# Altium PCB main_old.PcbDoc (part 3 of 15)
Units mil, origin at the board's own origin, x right, y up, seen from the top; angles counter-clockwise.
Board outline 8394.55 x 5164.44 mil, 7 copper layers (Top Layer 1, Layer 2, Layer 3, Unused, Layer 4_pow, Layer 5_gnd, Bottom 6+gnd), stack 46.112 mil thick; 363 components, 409 nets, 1750 pads, 991 vias.
Unrouted connection lines stored in the file: 1.
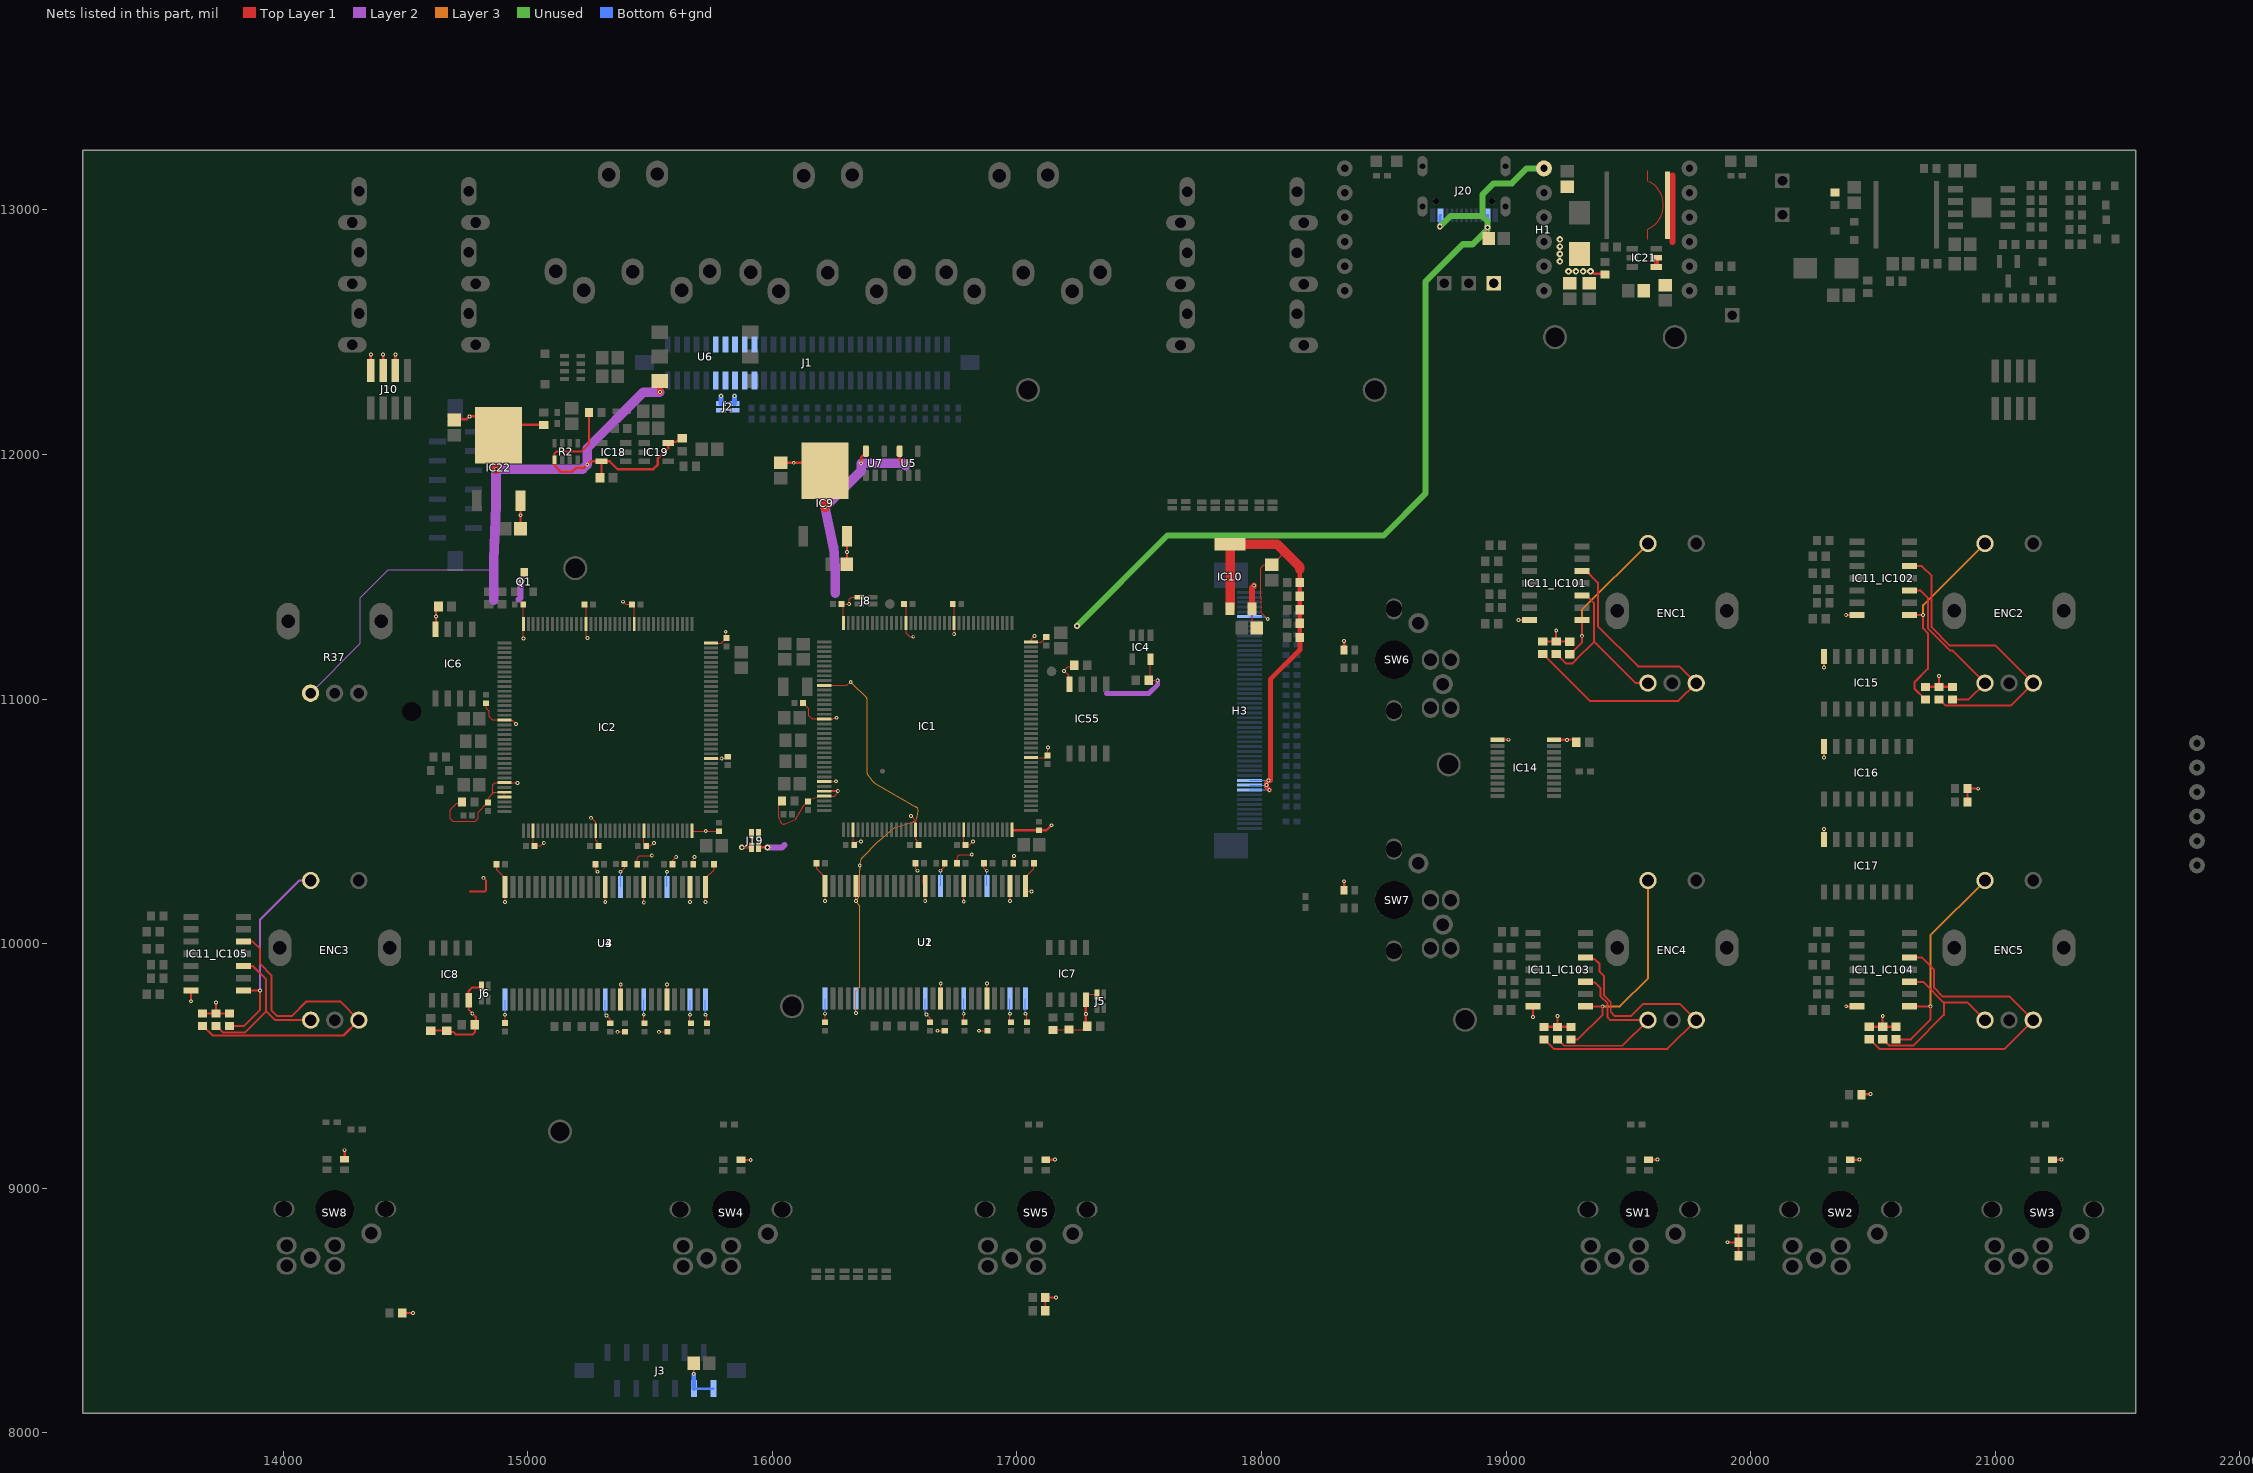
[diagram p6: the nets of this part, all layers, seen from the top]

## Via types
v1: diameter 15.75, hole 7.87, Top Layer 1 to Bottom 6+gnd, tented both sides, 923 vias
v2: diameter 27.56, hole 11.81, Top Layer 1 to Bottom 6+gnd, 45 vias
v3: diameter 23.62/23.62/23.62/23.62/23.62/23.62/23.62 (per signal layer), hole 12, Top Layer 1 to Bottom 6+gnd, tented top, 10 vias
v4: diameter 15.75, hole 7.87, Top Layer 1 to Bottom 6+gnd, 10 vias
v5: diameter 23.62/23.62/23.62/23.62/23.62/23.62/23.62 (per signal layer), hole 12, Top Layer 1 to Bottom 6+gnd, tented bottom, 3 vias

## Nets (pads, with @x,y where several pads share a name; then routed paths per layer and width w, separated by ;. In a path a pad name is that pad's centre, name@x,y a point inside that pad or via, vN(x,y) a via of type N, cw(c..) or ccw(c..) an arc to the next point about the centre after c; other vN are vias at no path point) (continued)
+MCU: (continued)
  Top Layer 1 w5: R6.1@14731.17,10579.63 14725.13,10573.59 14709.87,10573.59 14683.69,10547.41 14683.69,10510.42 14693.27,10500.84 14785.66,10500.84 14796.76,10511.94 14796.76,10537.57 14836.42,10577.23 C22.1@14837.21,10577.23 14837.21,10595.07 14856.76,10614.63 ; C23.1@14828.33,10982.94 14829.45,10981.82 14829.45,10962.67 14841.39,10950.74 14841.39,10928.26 14855.02,10914.63 IC2.17@14903.53,10914.63 ; C60.1@14872.11,10324.63 14872.05,10302.23 14907.25,10267.03 U3.27@14907.25,10232.09 14907.25,10232.03 v1@14907.25,10170.19 ; IC2.33@14904,10599.2 IC2.32@14904,10618.88 14861.01,10618.88 14856.76,10614.63 ; IC2.17@14904,10914.16 14936.68,10914.16 14951.33,10899.5 v1(14951.33,10898.26) ; C47.1@14905.91,9674.63 14906.7,9674.63 14907.12,9675.05 v1(14907.12,9709.43) ; v1(14958.33,10656.26) 14957.34,10657.25 14905,10657.25 IC2.30@14904,10658.25 14865.38,10658.25 14856.76,10649.63 14856.76,10614.63 ; v1(14974.74,11483.41) 14985,11493.68 Q1.3@14985,11518.19 ; C24.1@14981.25,11386.87 14982.27,11385.85 IC2.144@14982.27,11307.38 14981.71,11306.83 v1(14981.68,11247.06) ; IC2.39@15021.64,10461.87 15021.64,10404.75 C29.1@15026.76,10399.63 15052.7,10399.63 v1(15065.33,10412.26) ; C25.1@15231.25,11386.87 15238.18,11379.94 IC2.131@15238.18,11307.38 15238.18,11256.42 v1(15244.33,11250.26) ; v1(15258.85,10514.63) 15277.55,10495.93 IC2.52@15277.55,10461.87 15277.55,10422.52 15283.27,10416.8 15283.27,10405.44 C30.1@15289.08,10399.63 ; C59.1@15277.05,10324.63 15277.05,10302.02 v1(15284.96,10294.12) ; U3.14@15309.45,10275.1 15309.45,10239.53 U3.14@15316.95,10232.03 ; v1@15316.7,10170.19 U3.14@15316.7,10232.03 ; v1(15321.45,9706.63) 15336.7,9691.39 C48.1@15336.7,9674.63 ; v1(15366.7,9639.63) 15367.05,9639.98 C49.1@15396.7,9639.98 ; U3.43@15372.56,9764.27 15379.69,9771.4 U3.43@15379.69,9771.46 v1@15379.69,9833.24 ; v1(15379.45,10294.12) 15396.7,10311.37 C58.1@15396.7,10324.63 ; v1(15389.33,11398.26) 15400.72,11386.87 C26.1@15426.25,11386.87 15435.03,11378.09 IC2.121@15435.03,11307.38 ; C57.1@15447.11,10324.63 15447.05,10349.98 15456.59,10359.52 15506.06,10359.52 v1(15506.85,10360.31) ; v1(15473.93,9709.31) 15473.93,9677.39 C50.1@15476.7,9674.63 ; v1(15474.2,10167.96) U3.9@15474.2,10267.01 ; IC2.62@15474.4,10461.87 15474.4,10410.1 15484.08,10400.42 C31.1@15484.08,10399.63 15502.7,10399.63 v1(15515.33,10412.26) ; v1(15536.7,9639.63) 15571.35,9639.63 C51.1@15571.7,9639.98 ; U3.49@15568.67,9736.4 U3.49@15568.67,9771.46 v1@15568.67,9833.24 ; C56.1@15591.35,10324.63 15591.35,10339.27 v1(15606.7,10354.63) ; v1(15662.91,9709.31) 15662.91,9678.42 C52.1@15666.7,9674.63 ; v1@15663.16,10170.19 U3.3@15663.16,10232.09 U3.3@15663.16,10267.03 ; IC2.72@15673.14,10459.98 v1(15727.45,10459.98) C28.1@15781.76,10459.98 ; C55.1@15676.35,10324.63 15676.35,10346.05 15681.86,10351.56 v1(15681.86,10354.47) ; v1(15725.9,9709.31) 15725.9,9707.02 15732.09,9700.83 C53.1@15732.09,9674.63 ; v1@15726.15,10170.19 U3.1@15726.15,10232.09 15726.15,10267.03 15761.35,10302.23 C54.1@15761.35,10324.63 ; IC2.84@15749.52,10756.68 15792.16,10756.68 v1(15792.68,10757.2) 15810.28,10757.2 C32.1@15817.74,10764.66 ; IC2.108@15749.52,11229.12 15790.81,11229.12 15810.97,11249.27 C27.1@15811.76,11249.27 15809.33,11251.7 v1(15809.33,11275.26) ; J19.3@15915,10393.82 J19.1@15915,10448.94 ; J19.4@15942.56,10393.82 J19.2@15942.56,10448.94 ; R5.1@16039.41,10583.82 16026.04,10567.62 16026.04,10516.22 ccw(c16033.54,10516.22) 16026.61,10513.35 16032.84,10498.31 ccw(c16047.05,10504.19) 16053.5,10490.24 16094.96,10509.41 ccw(c16091.81,10516.22) 16098.35,10512.54 16126.31,10562.26 cw(c16132.85,10558.58) 16127.41,10563.75 16135.35,10572.11 C13.1@16145.45,10581.42 16155.54,10590.73 16185.71,10599.98 IC1.33@16212.24,10603.38 16254.57,10603.38 16265.32,10614.14 16265.32,10621.75 v1(16267.38,10623.8) ; C12.1@16135,10983.82 16135,10974.92 16149.63,10960.29 16149.63,10932.45 16163.26,10918.82 16211.77,10918.82 IC1.17@16212.24,10918.35 16246.23,10918.35 16249.16,10921.27 16253.68,10921.27 16254.06,10921.66 16259.92,10921.66 v1(16261.98,10923.71) ; C40.1@16180.35,10328.82 16180.35,10306.42 16215.55,10271.22 U1.27@16215.55,10236.22 v1@16215.55,10174.38 ; IC1.32@16185.71,10623.07 IC1.32@16212.24,10623.07 ; IC1.30@16185.71,10659.04 IC1.30@16212.24,10662.44 16238.78,10664.1 v1(16259.78,10664.1) ; C33.1@16214.21,9678.82 C33.1@16215,9678.82 16215.42,9679.24 v1(16215.42,9713.62) ; C11.1@16282.32,11388.82 C11.1@16282.94,11388.2 ; IC1.144@16290.51,11311.57 16290.51,11380.63 C11.1@16282.94,11388.2 ; IC1.39@16329.88,10466.06 16329.88,10408.94 C21.1@16335,10403.82 16335,10404.61 16344.31,10413.92 16345.1,10413.92 16349.15,10417.97 v1(16362.89,10417.97) ; J8.4@16354.88,11416.38 16322.56,11416.38 16314.09,11407.9 v1(16314.09,11388.2) C11.1@16282.94,11388.2 ; C14.1@16535,11398.82 16535,11398.03 16540.95,11392.09 16546.42,11386.61 IC1.131@16546.42,11311.57 16546.42,11269.87 16561.09,11255.2 v1(16576.09,11255.2) ; v1(16567.09,10522.2) 16585.79,10503.5 IC1.52@16585.79,10466.06 16585.79,10426.71 16591.51,10420.99 16591.51,10409.63 C20.1@16597.32,10403.82 ; C41.1@16585.35,10328.82 16585.35,10306.21 v1(16593.26,10298.31) ; U1.14@16617.75,10279.29 16617.75,10243.72 U1.14@16625.25,10236.22 ; v1@16625,10174.38 U1.14@16625,10236.22 ; v1(16629.75,9710.82) 16645,9695.58 C34.1@16645,9678.82 ; v1(16675,9643.82) 16675.35,9644.17 C35.1@16705,9644.17 ; U1.43@16680.86,9768.46 U1.43@16687.99,9775.59 v1@16687.99,9837.43 ; v1(16687.75,10298.31) 16705,10315.56 C46.1@16705,10328.82 ; C15.1@16735,11398.82 16743.27,11390.55 IC1.121@16743.27,11311.57 16743.32,11311.53 16743.32,11266.03 v1(16743.36,11265.98) ; C42.1@16755.35,10328.82 16755.35,10354.17 16764.89,10363.71 16814.36,10363.71 v1(16815.15,10364.5) ; v1(16782.23,9713.5) 16782.23,9681.58 C36.1@16785,9678.82 ; v1(16782.5,10172.15) U1.9@16782.5,10271.2 ; IC1.62@16782.64,10466.06 16782.64,10414.29 C19.1@16791.5,10405.42 ; C19.1@16789.9,10403.82 16806.7,10403.82 v1(16820.09,10417.2) ; v1(16845,9643.82) 16879.65,9643.82 C37.1@16880,9644.17 ; C43.1@16865,10328.82 16865,10310.03 v1(16876.72,10298.31) ; U1.49@16876.72,9775.34 v1@16876.72,9837.18 ; U1.49@16876.97,9740.59 U1.49@16876.97,9775.59 v1@16876.97,9837.43 ; U1.49@16877.21,9775.83 v1(16877.21,9837.68) ; U1.49@16877.46,9775.59 v1@16877.46,9837.43 ; v1(16971.21,9713.5) 16971.21,9682.61 C38.1@16975,9678.82 ; v1(16971.21,10174.13) U1.3@16971.21,10235.97 ; v1@16971.46,10174.38 U1.3@16971.46,10236.22 U1.3@16971.46,10271.22 ; v1@16971.7,10174.13 U1.3@16971.7,10236.4 ; v1@16971.95,10174.38 U1.3@16971.95,10236.22 ; IC1.72@16979.49,10466.06 IC1.72@16981.38,10464.17 ; C44.1@16984.65,10328.82 16984.65,10350.24 16985.28,10350.88 16985.28,10356.61 v1(16987.33,10358.66) ; v1(17034.2,9713.5) 17034.2,9711.21 17040.39,9705.02 C39.1@17040.39,9678.82 ; IC1.84@17057.76,10760.87 17117.05,10760.87 C17.1@17125,10768.82 17126.22,10770.04 v1(17126.22,10802.45) ; v1(17059.54,10213.31) 17041.95,10213.31 17034.45,10220.81 U1.1@17034.45,10236.22 17034.45,10271.22 17069.65,10306.42 C45.1@17069.65,10328.82 ; v1(17072.09,11258.2) 17057.76,11243.87 IC1.108@17057.76,11233.31 17099.06,11233.31 17119.21,11253.46 C16.1@17120,11253.46 ; R14.2@17147.09,9647.2 17267.09,9647.2 C65.2@17282.09,9662.2 ; IC55.8@17215,11060.55 17211.22,11064.33 17211.22,11097.6 17193.23,11115.59 17192.67,11115.59 17208.53,11131.45 17227.55,11131.45 C63.2@17234.92,11138.82 ; IC7.8@17282.09,9770.43 17282.09,9782.03 17292.38,9792.32 J5.1@17333.31,9792.32 ; C61.1@17538.46,11076.73 17542.79,11076.73 17543.39,11076.14 17575.18,11076.14 v1(17575.47,11075.84) ; C61.1@17543.39,11076.73 17545.79,11079.13 IC4.5@17545.79,11162.52 ; v3@18924.23,12928.31 18924.23,12887.18 C88.2@18928.11,12883.31
  Top Layer 1 w8: R16.2@14602.15,9645.26 R16.2@14603.33,9644.08 R15.2@14668.33,9644.08 14672.94,9639.47 14694.35,9639.47 14705,9628.82 14775,9628.82 14783.15,9636.97 C64.2@14783.15,9668.82 ; IC6.8@14625,11293.82 v1@14625,11337.99 ; v1(14625.16,11338.15) 14625.16,11369.06 C86.2@14634.92,11378.82 ; 14763.33,10213.49 14825.07,10213.49 14828.33,10216.75 14828.33,10259.26 v1(14818.33,10269.26) ; C64.2@14790,9658.82 14790,9678.59 14787.46,9681.13 14787.46,9700.13 v1(14772.9,9714.69) 14758.33,9729.26 IC8.8@14758.33,9768.49 14757.33,9769.49 14757.33,9806.01 14772.58,9821.26 14806.77,9821.26 J6.1@14810.77,9825.26 ; R2.1@15108.96,11978.65 15108.96,12004.87 15116.2,12012.11 15219.19,12012.11 15250.02,12042.94 R103.1@15250.02,12172.11 ; IC19.5@15574.63,12047.11 15579.18,12051.67 15605.56,12051.67 15614.2,12060.31 15634.2,12060.31 C81.1@15641.2,12067.31 ; IC1.32@16223.05,10623.96 v1@16267.22,10623.96
  Top Layer 1 w10: C87.2@14700,12141.18 14702.99,12144.17 14749.6,12144.17 14762,12156.57 14802.57,12156.57 IC22.4@14880.24,12078.9 14922.64,12121.3 R139.1@15065,12121.3 ; R2.1@15108.96,11978.65 15110.49,11977.11 15110.49,11952.39 15132.86,11930.02 15180.93,11930.02 15196.32,11945.4 15229.5,11945.4 v1(15242.95,11958.86) 15256.4,11972.31 IC18.5@15301.2,11972.31 ; C80.1@15295,11905 15301.2,11911.2 IC18.5@15301.2,11972.31 ; IC19.5@15574.63,12047.11 15573.67,12046.16 15573.67,12026.16 15530.46,11982.94 15530.46,11957.66 15512.5,11939.71 15367.23,11939.71 15334.63,11972.31 IC18.5@15301.2,11972.31 ; v3(15875,10393.82) J19.3@15915,10393.82 ; J19.4@15942.56,10393.82 15942.69,10393.68 v3(15980.14,10393.68) ; C71.2@16035,11966.18 v1(16087.28,11966.18) 16182.95,11966.18 IC9.4@16215.24,11933.9 ; v1(16362.91,11964.41) 16362.91,11989.14 16369.27,11995.5 16376.05,11995.5 16382.6,12002.05 U7.5@16382.6,12013.82 ; U5.5@16520,12013.82 16520,11980 v1(16545,11955) ; IC1.72@16979.49,10466.06 16979.49,10464.72 16980.39,10463.82 C18.1@17090,10463.82 17120.7,10463.82 v1(17141.09,10484.2) ; C65.2@17282.09,9662.2 v1(17282.09,9711.82) IC7.8@17282.09,9770.43
  Top Layer 1 w25: v1(15539.96,12255.04) U6.6@15539.96,12300
  Top Layer 1 w39.37: v1(14870,11940) 14873.2,11983.42 IC22.4@14880.24,12078.9 ; v1(16215,11785) 16215.08,11838.42 IC9.4@16215.24,11933.9
  Layer 2 w5: R37.1@14111.58,11024.25 14315,11227.68 14315,11413.82 14430,11528.82 14860,11528.82
  Layer 2 w20: 17365,11022.83 17539.49,11022.83 17575.47,11058.82 v1(17575.47,11075.84)
  Layer 2 w25: 14860,11403.82 14865,11398.82 ; 14962.74,11406.56 14970,11413.82 14970,11478.68 v1(14974.74,11483.41) ; v3(15980.14,10393.68) 15980.27,10393.82 16040,10393.82 16050,10403.82
  Layer 2 w39.37: 14860,11403.82 14860,11528.82 14860,11569.11 cw(c14899.37,11569.11) 14860.04,11570.88 14869.96,11789.11 ccw(c14830.63,11790.9) 14870,11790.9 v1(14870,11940) 15224.09,11940 v1(15242.95,11958.86) 15242.95,12025.67 15472.32,12255.04 v1(15539.96,12255.04) ; 16257.72,11432.89 16257.72,11540 16250.21,11617.79 ccw(c16211.03,11614.01) 16249.54,11622.18 v1(16215,11785) 16362.91,11932.91 v1(16362.91,11964.41) 16535.59,11964.41 v1(16545,11955)
  Unused w25: v1(14974.74,11483.41) v1@14975,11483.68 ; v5(17245,11298.82) 17615.17,11668.99 18498.99,11668.99 18670.37,11840.37 18670.37,12707.33 18823.09,12860.05 18863.02,12860.05 18923.94,12920.97 v3(18923.94,12929.01) 18924.27,12929.33 18924.27,12953.87 18903.09,12975.04 ; v3@18729.39,12932.32 18772.11,12975.04 18903.09,12975.04 ; H1.6@19154.81,13169.99 19084.65,13169.99 19023.56,13108.89 18948.89,13108.89 18903.09,13063.09 18903.09,12975.04
  Bottom 6+gnd w5: v1@14907.01,9709.31 v1(14907.12,9709.43) ; v1@14907.25,9709.56 U4.27@14907.25,9771.4 ; v1@15316.7,9709.56 U4.14@15316.7,9771.4 ; U4.43@15379.69,10232.03 U4.43@15379.69,10232.09 v1@15379.69,10293.87 ; v1@15471.88,9707.26 v1(15473.93,9709.31) ; v1@15474.18,9709.56 U4.9@15474.18,9771.4 ; v1(15568.42,10294.12) 15568.42,10232.33 U4.49@15568.67,10232.09 ; v1@15663.16,9709.56 U4.3@15663.16,9771.4 ; v1@15726.15,9709.56 U4.1@15726.15,9771.4 ; v1@16215.31,9713.5 v1(16215.42,9713.62) ; v1@16215.55,9713.75 U2.27@16215.55,9775.59 ; v1@16625,9713.75 U2.14@16625,9775.59 ; U2.43@16687.99,10236.22 v1@16687.99,10298.06 ; v1@16780.18,9711.45 v1(16782.23,9713.5) ; v1@16782.48,9713.75 U2.9@16782.48,9775.59 ; U2.49@16876.97,10236.22 v1@16876.97,10298.06 ; v1@16971.46,9713.75 U2.3@16971.46,9775.59 ; v1@17034.45,9713.75 U2.1@17034.45,9775.59
  Bottom 6+gnd w12: v3(18729.12,12932.59) 18729.12,12976.17 J20.A4B9@18731.35,12978.4 ; v3(18923.94,12929.01) 18924.27,12929.33 J20.B4A9@18924.27,12978.4
  other v1: 15379.94,9833.49 15568.91,9833.49 16688.24,9837.68 14907.01,10169.94 15316.45,10169.94 15662.91,10169.94 15725.9,10169.94 16215.31,10174.13 16624.75,10174.13 17192.62,11115.59 14760.95,12155.52
+V_SYS: C69.2 C90.2 IC21.4 IC21.5 L1.1 R18.1 | length 307.4
  Top Layer 1 w20: IC21.4@19614.81,12767 IC21.5@19614.81,12804.4
  Top Layer 1 w25: 19679.81,12869.99 19679.81,13139.99
_A_ENC1: ENC1.A IC11_IC101.3 R22.1 | length 717.2
  Top Layer 1 w8: R22.1@19205,11183.82 19206.97,11183.82 19244.64,11146.15 19270.82,11146.15 19282.17,11157.5 19282.43,11157.5 19287.7,11162.77 19287.7,11163.03 19360,11235.33 19530.04,11065.28 ENC1.A@19580.33,11065.28 ; IC11_IC101.3@19310,11423.82 19327.72,11423.82 19360,11391.54 19360,11236.13
_A_ENC2: ENC2.A IC11_IC102.3 R23.1 | length 699.5
  Top Layer 1 w8: IC11_IC102.3@20649.57,11443.82 20695,11443.82 20725,11413.82 20725,11288.82 20815,11198.82 20824.74,11198.82 ENC2.A@20958.28,11065.28 20891.82,10998.82 R23.1@20825,10998.82
_A_ENC3: ENC4.A IC11_IC103.3 R29.1 | length 797.9
  Top Layer 1 w8: R29.1@19210,9608.23 19211.97,9608.23 19237.7,9582.5 19475.5,9582.5 ENC4.A@19580.33,9687.33 19517.58,9687.33 19426.49,9687.33 19415,9698.82 19415,9755.43 19385.54,9784.89 19385.54,9819.36 19362.83,9842.08 19326.74,9842.08 IC11_IC103.3@19325,9843.82
_A_ENC4: ENC5.A IC11_IC104.3 R30.1 | length 736.3
  Top Layer 1 w8: R30.1@20540,9608.82 20541.97,9608.82 20567.7,9583.09 20664.27,9583.09 20790,9708.82 20790,9758.82 ; IC11_IC104.3@20649.57,9843.82 20705,9843.82 20790,9758.82 ; ENC5.A@20958.28,9687.33 20886.79,9758.82 20790,9758.82
_A_ENC5: ENC3.A IC11_IC105.3 R28.1 | length 694.2
  Top Layer 1 w8: R28.1@13725,9663.23 13726.97,9663.23 13752.7,9637.5 13843.68,9637.5 13930,9723.82 ; IC11_IC105.3@13837.28,9908.82 13837.39,9908.71 13875.11,9908.71 13930,9853.82 13930,9723.82 ; ENC3.A@14112.21,9687.33 13966.49,9687.33 13930,9723.82
_B_ENC1: ENC1.B IC11_IC101.5 R24.1 | length 1497.4
  Top Layer 1 w8: R24.1@19150,11183.82 19151.97,11183.82 19342.86,10992.93 19704.83,10992.93 ENC1.B@19777.18,11065.28 19708.64,11133.82 19540,11133.82 19375,11298.82 19375,11476.54 19327.72,11523.82 IC11_IC101.5@19310,11523.82
_B_ENC2: ENC2.B IC11_IC102.5 R25.1 | length 1260.8
  Top Layer 1 w8: IC11_IC102.5@20649.57,11543.82 20700,11543.82 20740,11503.82 20740,11293.82 20815,11218.82 21001.59,11218.82 ENC2.B@21155.13,11065.28 21062.94,10973.09 20797.7,10973.09 20771.97,10998.82 R25.1@20770,10998.82
_B_ENC3: ENC4.B IC11_IC103.5 R32.1 | length 1374.9
  Top Layer 1 w8: R32.1@19155,9608.23 19156.97,9608.23 19195.7,9569.5 19659.35,9569.5 ENC4.B@19777.18,9687.33 19710.69,9753.82 19560,9753.82 19510,9703.82 19445,9703.82 19428,9720.82 19428,9760.82 19400,9788.82 19400,9867.83 19382.35,9885.48 19382.35,9916.78 19362.3,9936.84 19331.98,9936.84 IC11_IC103.5@19325,9943.82
_B_ENC4: ENC5.B IC11_IC104.5 R33.1 | length 1391.5
  Top Layer 1 w8: R33.1@20485,9608.82 20486.97,9608.82 20526.97,9568.82 21036.62,9568.82 ENC5.B@21155.13,9687.33 21058.64,9783.82 20785,9783.82 20750,9818.82 20750,9893.82 20700,9943.82 IC11_IC104.5@20649.57,9943.82
_B_ENC5: ENC3.B IC11_IC105.5 R31.1 | length 1455.9
  Top Layer 1 w8: R31.1@13670,9663.23 13671.97,9663.23 13710.7,9624.5 14246.22,9624.5 ENC3.B@14309.06,9687.33 14232.57,9763.82 14105,9763.82 14095,9763.82 14035,9703.82 13975,9703.82 13951.69,9727.13 13951.69,9870.51 13905,9917.2 13905,9978.82 13875.11,10008.71 13837.39,10008.71 IC11_IC105.5@13837.28,10008.82
_BTN_1: ENC1.1 IC11_IC101.1 R26.1 | length 651.7
  Top Layer 1 w8: R26.1@19260,11183.23 19261.97,11183.23 19310,11231.26 v1(19310,11258.82) IC11_IC101.1@19310,11323.82
  Layer 3 w8: v1(19310,11258.82) 19310,11365.81 ENC1.1@19580.33,11636.14
_BTN_2: ENC2.1 IC11_IC102.1 R27.1 | length 849.6
  Top Layer 1 w8: IC11_IC102.1@20649.57,11343.82 v1(20705,11343.82) 20705,11288.82 20725,11268.82 20725,11123.82 20670,11068.82 20670,11041.85 20713.03,10998.82 R27.1@20715,10998.82
  Layer 3 w8: v1(20705,11343.82) 20705,11384.64 20956.5,11636.14 ENC2.1@20958.28,11636.14
_BTN_3: ENC4.1 IC11_IC103.1 R35.1 | length 908.4
  Top Layer 1 w8: R35.1@19265,9608.23 19293.73,9608.23 19395,9709.5 v1(19395,9743.82) IC11_IC103.1@19325,9743.82
  Layer 3 w8: v1(19395,9743.82) 19465,9743.82 19580.33,9859.15 ENC4.1@19580.33,10258.19
_BTN_4: ENC5.1 IC11_IC104.1 R36.1 | length 920.4
  Top Layer 1 w8: R36.1@20595,9608.82 20655,9608.82 20735,9688.82 v1(20735,9743.82) IC11_IC104.1@20649.57,9743.82
  Layer 3 w8: v1(20735,9743.82) 20735,10034.91 ENC5.1@20958.28,10258.19
_BTN_5: ENC3.1 IC11_IC105.1 R34.1 | length 862.7
  Top Layer 1 w8: R34.1@13780,9663.23 13838.67,9663.23 13905,9729.55 v1(13905,9808.82) IC11_IC105.1@13837.28,9808.82
  Layer 2 w8: v1(13905,9808.82) 13905,10098.82 14064.37,10258.19 ENC3.1@14112.21,10258.19
A0: IC1.10 U1.23 U2.23 | length 3439.8
  Top Layer 1 w5: IC1.10@16212.24,11056.14 16212.78,11056.67 16304.21,11056.67 16317.4,11069.86 v1(16320.26,11069.86) ; v1@16341.29,10174.62 U1.23@16341.29,10235.97
  Layer 3 w5: v1(16320.26,11069.86) 16384.98,11005.09 ; v1(16341.17,9716.01) 16341.17,9804.99 cw(c16346.17,9804.99) 16342.61,9808.51 16355.95,9821.89 ; v1(16341.29,10174.13) ccw(c16346.29,10174.13) 16342.34,10171.06 16356.36,10152.99 ; v1(16341.29,10174.13) cw(c16346.29,10174.13) v1@16342.36,10177.23 ; v1@16342.36,10177.22 16356.34,10194.98 ; v1(16357.12,10320.11) 16357.41,10302.31 ; v1@16357.12,10320.15 cw(c16362.12,10320.15) 16357.28,10321.39 16363.24,10345.1 cw(c16377.79,10341.44) 16367.14,10352.01 16433.49,10418.35 ; 16357.41,10149.97 16357.41,9825.33 ; 16386.44,11001.6 16386.47,10700.83 ccw(c16401.84,10700.79) 16389.53,10691.59 16408.86,10665.89 ; 16595.69,10542.97 16592.21,10518.61 ; 16355.95,9821.89 ccw(c16352.41,9825.42) 16357.41,9825.33 ; 16355.95,9821.89 ccw(c16352.41,9825.42) 16357.41,9825.33 ; 16355.95,9821.89 ccw(c16352.41,9825.42) 16357.41,9825.33 ; 16355.95,9821.89 ccw(c16352.41,9825.42) 16357.41,9825.33 ; 16355.95,9821.89 ccw(c16352.41,9825.42) 16357.41,9825.33 ; 16355.95,9821.89 ccw(c16352.41,9825.42) 16357.41,9825.33 ; 16355.95,9821.89 ccw(c16352.41,9825.42) 16357.41,9825.33 ; 16355.95,9821.89 ccw(c16352.41,9825.42) 16357.41,9825.33 ; 16355.95,9821.89 ccw(c16352.41,9825.42) 16357.41,9825.33 ; 16355.95,9821.89 ccw(c16352.41,9825.42) 16357.41,9825.33 ; 16355.95,9821.89 ccw(c16352.41,9825.42) 16357.41,9825.33 ; 16355.95,9821.89 ccw(c16352.41,9825.42) 16357.41,9825.33 ; 16355.95,9821.89 ccw(c16352.41,9825.42) 16357.41,9825.33 ; 16355.95,9821.89 ccw(c16352.41,9825.42) 16357.41,9825.33 ; 16355.95,9821.89 ccw(c16352.41,9825.42) 16357.41,9825.33 ; 16355.95,9821.89 ccw(c16352.41,9825.42) 16357.41,9825.33 ; 16356.36,10152.99 cw(c16352.41,10149.93) 16357.41,10150.02 ; 16356.36,10152.99 cw(c16352.41,10149.93) 16357.41,10150.02 ; 16356.36,10152.99 cw(c16352.41,10149.93) 16357.41,10150.02 ; 16356.36,10152.99 cw(c16352.41,10149.93) 16357.41,10150.02 ; 16356.36,10152.99 cw(c16352.41,10149.93) 16357.41,10150.02 ; 16356.36,10152.99 cw(c16352.41,10149.93) 16357.41,10150.02 ; 16356.36,10152.99 cw(c16352.41,10149.93) 16357.41,10150.02 ; 16356.36,10152.99 cw(c16352.41,10149.93) 16357.41,10150.02 ; 16356.36,10152.99 cw(c16352.41,10149.93) 16357.41,10150.02 ; 16356.36,10152.99 cw(c16352.41,10149.93) 16357.41,10150.02 ; 16356.36,10152.99 cw(c16352.41,10149.93) 16357.41,10150.02 ; 16356.36,10152.99 cw(c16352.41,10149.93) 16357.41,10150.02 ; 16356.36,10152.99 cw(c16352.41,10149.93) 16357.41,10150.02 ; 16356.36,10152.99 cw(c16352.41,10149.93) 16357.41,10150.02 ; 16356.36,10152.99 cw(c16352.41,10149.93) 16357.41,10150.02 ; 16356.36,10152.99 cw(c16352.41,10149.93) 16357.41,10150.02 ; 16356.34,10194.98 ccw(c16352.41,10198.07) 16357.41,10197.98 ; 16356.34,10194.98 ccw(c16352.41,10198.07) 16357.41,10197.98 ; 16356.34,10194.98 ccw(c16352.41,10198.07) 16357.41,10197.98 ; 16356.34,10194.98 ccw(c16352.41,10198.07) 16357.41,10197.98 ; 16356.34,10194.98 ccw(c16352.41,10198.07) 16357.41,10197.98 ; 16356.34,10194.98 ccw(c16352.41,10198.07) 16357.41,10197.98 ; 16356.34,10194.98 ccw(c16352.41,10198.07) 16357.41,10197.98 ; 16356.34,10194.98 ccw(c16352.41,10198.07) 16357.41,10197.98 ; 16356.34,10194.98 ccw(c16352.41,10198.07) 16357.41,10197.98 ; 16356.34,10194.98 ccw(c16352.41,10198.07) 16357.41,10197.98 ; 16356.34,10194.98 ccw(c16352.41,10198.07) 16357.41,10197.98 ; 16356.34,10194.98 ccw(c16352.41,10198.07) 16357.41,10197.98 ; 16356.34,10194.98 ccw(c16352.41,10198.07) 16357.41,10197.98 ; 16356.34,10194.98 ccw(c16352.41,10198.07) 16357.41,10197.98 ; 16356.34,10194.98 ccw(c16352.41,10198.07) 16357.41,10197.98 ; 16356.34,10194.98 ccw(c16352.41,10198.07) 16357.41,10197.98 ; 16357.41,10197.98 16357.41,10302.24 ; 16357.41,10302.25 ccw(c16352.41,10302.23) 16357.41,10302.31 ; 16357.41,10302.25 ccw(c16352.41,10302.23) 16357.41,10302.31 ; 16357.41,10302.25 ccw(c16352.41,10302.23) 16357.41,10302.31 ; 16357.41,10302.25 ccw(c16352.41,10302.23) 16357.41,10302.31 ; 16357.41,10302.25 ccw(c16352.41,10302.23) 16357.41,10302.31 ; 16384.98,11005.09 cw(c16381.44,11001.56) 16386.44,11001.65 ; 16384.98,11005.09 cw(c16381.44,11001.56) 16386.44,11001.65 ; 16384.98,11005.09 cw(c16381.44,11001.56) 16386.44,11001.65 ; 16384.98,11005.09 cw(c16381.44,11001.56) 16386.44,11001.65 ; 16384.98,11005.09 cw(c16381.44,11001.56) 16386.44,11001.65 ; 16384.98,11005.09 cw(c16381.44,11001.56) 16386.44,11001.65 ; 16384.98,11005.09 cw(c16381.44,11001.56) 16386.44,11001.65 ; 16384.98,11005.09 cw(c16381.44,11001.56) 16386.44,11001.65 ; 16384.98,11005.09 cw(c16381.44,11001.56) 16386.44,11001.65 ; 16384.98,11005.09 cw(c16381.44,11001.56) 16386.44,11001.65 ; 16384.98,11005.09 cw(c16381.44,11001.56) 16386.44,11001.65 ; 16384.98,11005.09 cw(c16381.44,11001.56) 16386.44,11001.65 ; 16384.98,11005.09 cw(c16381.44,11001.56) 16386.44,11001.65 ; 16384.98,11005.09 cw(c16381.44,11001.56) 16386.44,11001.65 ; 16384.98,11005.09 cw(c16381.44,11001.56) 16386.44,11001.65 ; 16384.98,11005.09 cw(c16381.44,11001.56) 16386.44,11001.65 ; 16408.86,10665.89 ccw(c16437.09,10687.2) 16419.31,10656.62 ; 16408.86,10665.89 ccw(c16437.09,10687.2) 16419.31,10656.62 ; 16408.86,10665.89 ccw(c16437.09,10687.2) 16419.31,10656.62 ; 16408.86,10665.89 ccw(c16437.09,10687.2) 16419.31,10656.62 ; 16408.86,10665.89 ccw(c16437.09,10687.2) 16419.31,10656.62 ; 16408.86,10665.89 ccw(c16437.09,10687.2) 16419.31,10656.62 ; 16408.86,10665.89 ccw(c16437.09,10687.2) 16419.31,10656.62 ; 16408.86,10665.89 ccw(c16437.09,10687.2) 16419.31,10656.62 ; 16408.86,10665.89 ccw(c16437.09,10687.2) 16419.31,10656.62 ; 16408.86,10665.89 ccw(c16437.09,10687.2) 16419.31,10656.62 ; 16408.86,10665.89 ccw(c16437.09,10687.2) 16419.31,10656.62 ; 16408.86,10665.89 ccw(c16437.09,10687.2) 16419.31,10656.62 ; 16408.86,10665.89 ccw(c16437.09,10687.2) 16419.31,10656.62 ; 16408.86,10665.89 ccw(c16437.09,10687.2) 16419.31,10656.62 ; 16408.86,10665.89 ccw(c16437.09,10687.2) 16419.31,10656.62 ; 16408.86,10665.89 ccw(c16437.09,10687.2) 16419.31,10656.62 ; 16419.31,10656.62 16588.2,10558.44 ; 16433.49,10418.35 cw(c16472.28,10379.36) 16435.9,10420.61 ; 16433.49,10418.35 cw(c16472.28,10379.36) 16435.9,10420.61 ; 16433.49,10418.35 cw(c16472.28,10379.36) 16435.9,10420.61 ; 16433.49,10418.35 cw(c16472.28,10379.36) 16435.9,10420.61 ; 16433.49,10418.35 cw(c16472.28,10379.36) 16435.9,10420.61 ; 16433.49,10418.35 cw(c16472.28,10379.36) 16435.9,10420.61 ; 16433.49,10418.35 cw(c16472.28,10379.36) 16435.9,10420.61 ; 16433.49,10418.35 cw(c16472.28,10379.36) 16435.9,10420.61 ; 16433.49,10418.35 cw(c16472.28,10379.36) 16435.9,10420.61 ; 16433.49,10418.35 cw(c16472.28,10379.36) 16435.9,10420.61 ; 16433.49,10418.35 cw(c16472.28,10379.36) 16435.9,10420.61 ; 16433.49,10418.35 cw(c16472.28,10379.36) 16435.9,10420.61 ; 16433.49,10418.35 cw(c16472.28,10379.36) 16435.9,10420.61 ; 16433.49,10418.35 cw(c16472.28,10379.36) 16435.9,10420.61 ; 16433.49,10418.35 cw(c16472.28,10379.36) 16435.9,10420.61 ; 16433.49,10418.35 cw(c16472.28,10379.36) 16435.9,10420.61 ; 16435.9,10420.61 16483.56,10462.64 ; 16483.56,10462.64 cw(c16526.79,10413.6) 16506.57,10475.77 ; 16483.56,10462.64 cw(c16526.79,10413.6) 16506.57,10475.77 ; 16483.56,10462.64 cw(c16526.79,10413.6) 16506.57,10475.77 ; 16483.56,10462.64 cw(c16526.79,10413.6) 16506.57,10475.77 ; 16483.56,10462.64 cw(c16526.79,10413.6) 16506.57,10475.77 ; 16483.56,10462.64 cw(c16526.79,10413.6) 16506.57,10475.77 ; 16483.56,10462.64 cw(c16526.79,10413.6) 16506.57,10475.77 ; 16483.56,10462.64 cw(c16526.79,10413.6) 16506.57,10475.77 ; 16483.56,10462.64 cw(c16526.79,10413.6) 16506.57,10475.77 ; 16483.56,10462.64 cw(c16526.79,10413.6) 16506.57,10475.77 ; 16483.56,10462.64 cw(c16526.79,10413.6) 16506.57,10475.77 ; 16483.56,10462.64 cw(c16526.79,10413.6) 16506.57,10475.77 ; 16483.56,10462.64 cw(c16526.79,10413.6) 16506.57,10475.77 ; 16483.56,10462.64 cw(c16526.79,10413.6) 16506.57,10475.77 ; 16483.56,10462.64 cw(c16526.79,10413.6) 16506.57,10475.77 ; 16483.56,10462.64 cw(c16526.79,10413.6) 16506.57,10475.77 ; 16506.57,10475.77 16574.96,10498.08 ; 16574.96,10498.08 ccw(c16567.09,10522.2) 16592.21,10518.61 ; 16574.96,10498.08 ccw(c16567.09,10522.2) 16592.21,10518.61 ; 16574.96,10498.08 ccw(c16567.09,10522.2) 16592.21,10518.61 ; 16574.96,10498.08 ccw(c16567.09,10522.2) 16592.21,10518.61 ; 16574.96,10498.08 ccw(c16567.09,10522.2) 16592.21,10518.61 ; 16574.96,10498.08 ccw(c16567.09,10522.2) 16592.21,10518.61 ; 16574.96,10498.08 ccw(c16567.09,10522.2) 16592.21,10518.61 ; 16574.96,10498.08 ccw(c16567.09,10522.2) 16592.21,10518.61 ; 16574.96,10498.08 ccw(c16567.09,10522.2) 16592.21,10518.61 ; 16574.96,10498.08 ccw(c16567.09,10522.2) 16592.21,10518.61 ; 16574.96,10498.08 ccw(c16567.09,10522.2) 16592.21,10518.61 ; 16574.96,10498.08 ccw(c16567.09,10522.2) 16592.21,10518.61 ; 16574.96,10498.08 ccw(c16567.09,10522.2) 16592.21,10518.61 ; 16574.96,10498.08 ccw(c16567.09,10522.2) 16592.21,10518.61 ; 16574.96,10498.08 ccw(c16567.09,10522.2) 16592.21,10518.61 ; 16574.96,10498.08 ccw(c16567.09,10522.2) 16592.21,10518.61 ; 16588.2,10558.44 cw(c16580.47,10545.15) 16595.69,10542.98 ; 16588.2,10558.44 cw(c16580.47,10545.15) 16595.69,10542.98 ; 16588.2,10558.44 cw(c16580.47,10545.15) 16595.69,10542.98 ; 16588.2,10558.44 cw(c16580.47,10545.15) 16595.69,10542.98 ; 16588.2,10558.44 cw(c16580.47,10545.15) 16595.69,10542.98 ; 16588.2,10558.44 cw(c16580.47,10545.15) 16595.69,10542.98 ; 16588.2,10558.44 cw(c16580.47,10545.15) 16595.69,10542.98 ; 16588.2,10558.44 cw(c16580.47,10545.15) 16595.69,10542.98 ; 16588.2,10558.44 cw(c16580.47,10545.15) 16595.69,10542.98 ; 16588.2,10558.44 cw(c16580.47,10545.15) 16595.69,10542.98 ; 16588.2,10558.44 cw(c16580.47,10545.15) 16595.69,10542.98 ; 16588.2,10558.44 cw(c16580.47,10545.15) 16595.69,10542.98 ; 16588.2,10558.44 cw(c16580.47,10545.15) 16595.69,10542.98 ; 16588.2,10558.44 cw(c16580.47,10545.15) 16595.69,10542.98 ; 16588.2,10558.44 cw(c16580.47,10545.15) 16595.69,10542.98 ; 16588.2,10558.44 cw(c16580.47,10545.15) 16595.69,10542.98
  Bottom 6+gnd w5: v1@16341.54,9713.75 U2.23@16341.54,9775.59